# EAGLE board rekick004-panelized (EAGLE 4.16)
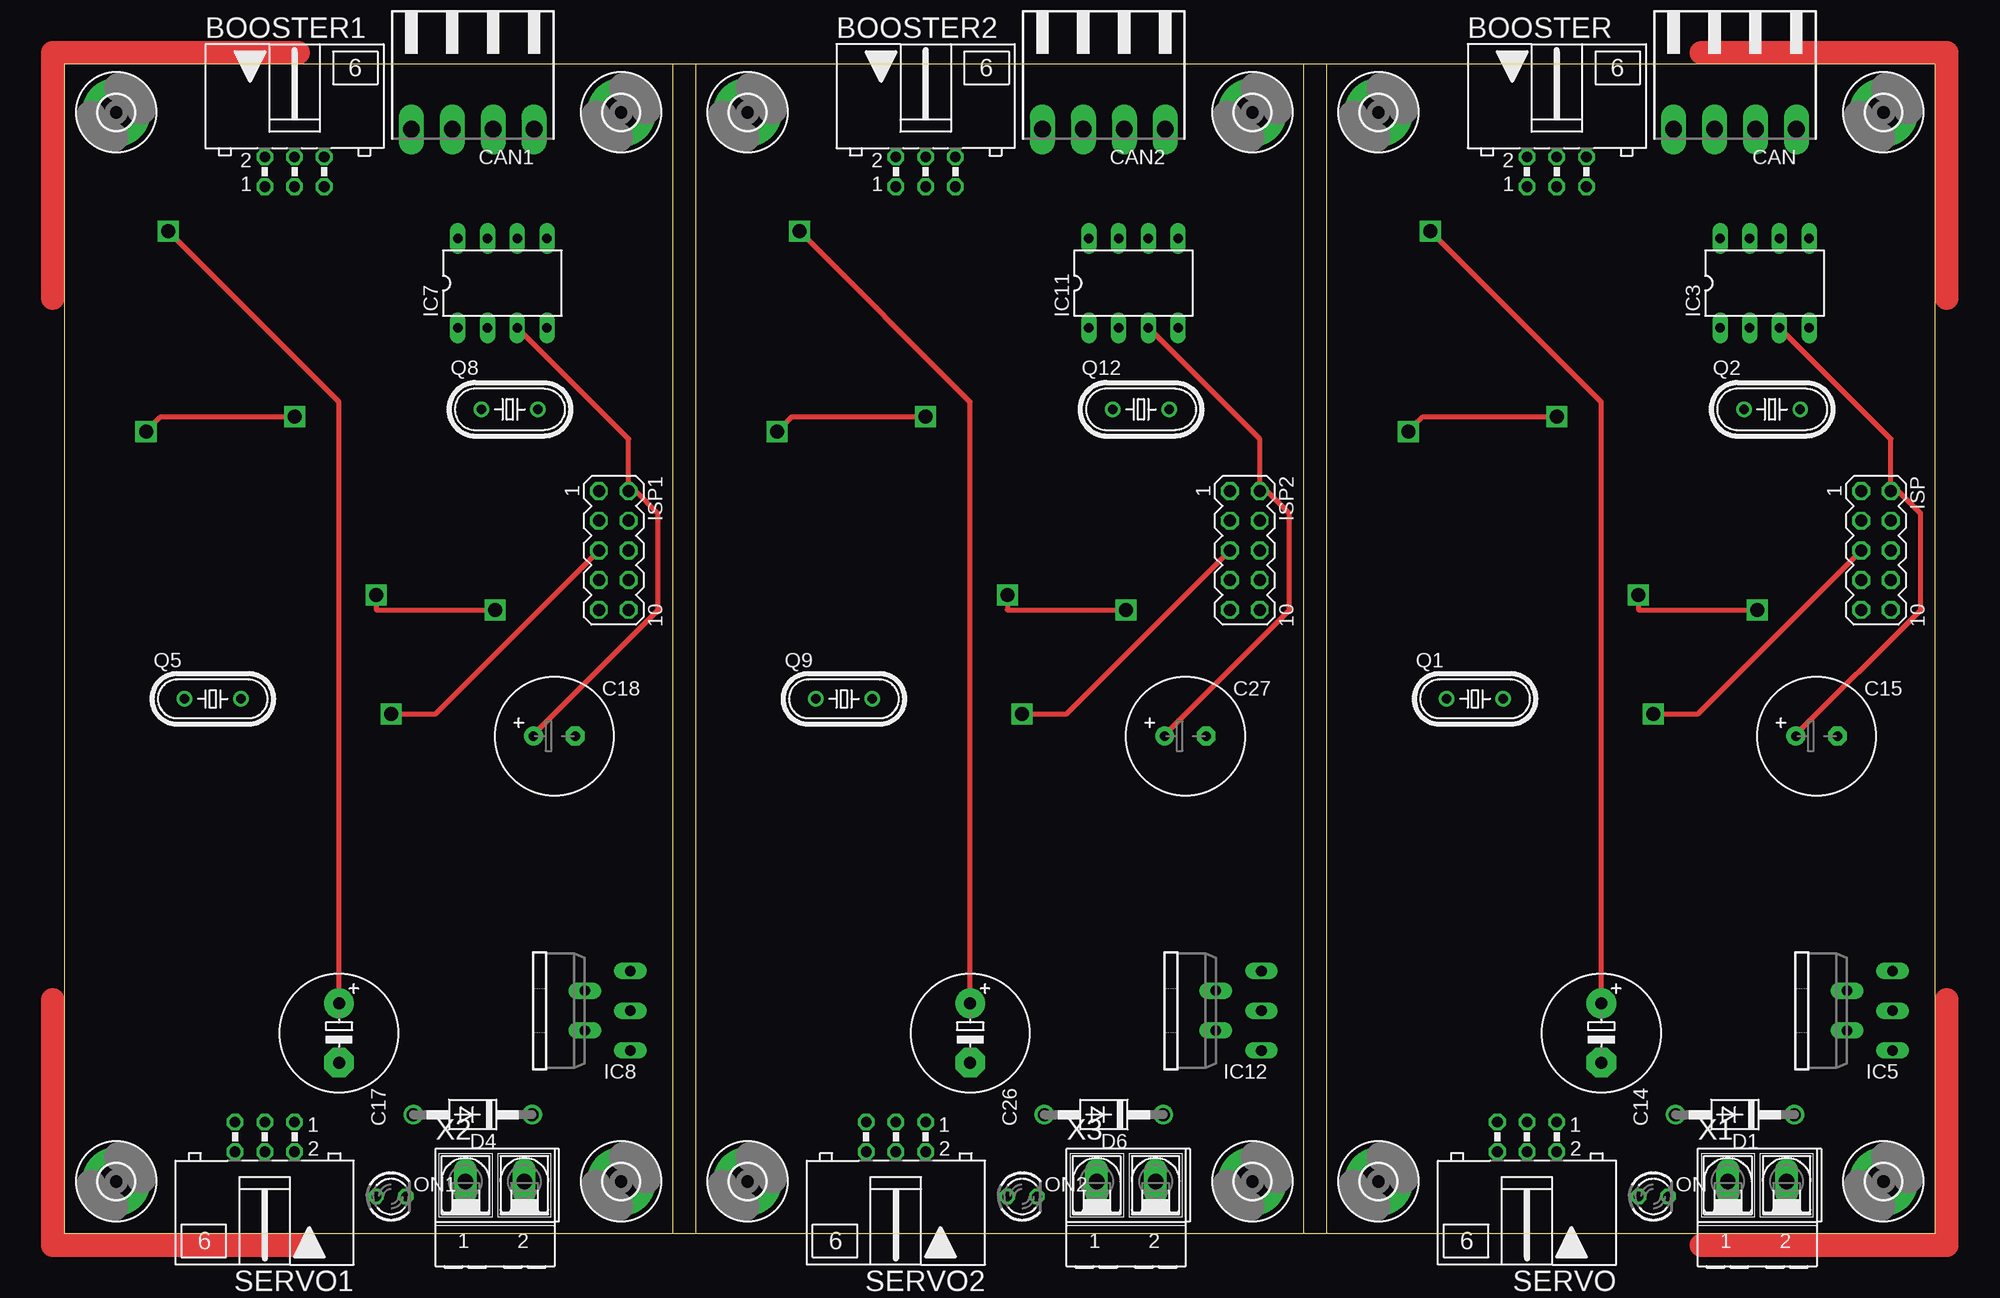
[diagram p0: board, top side]
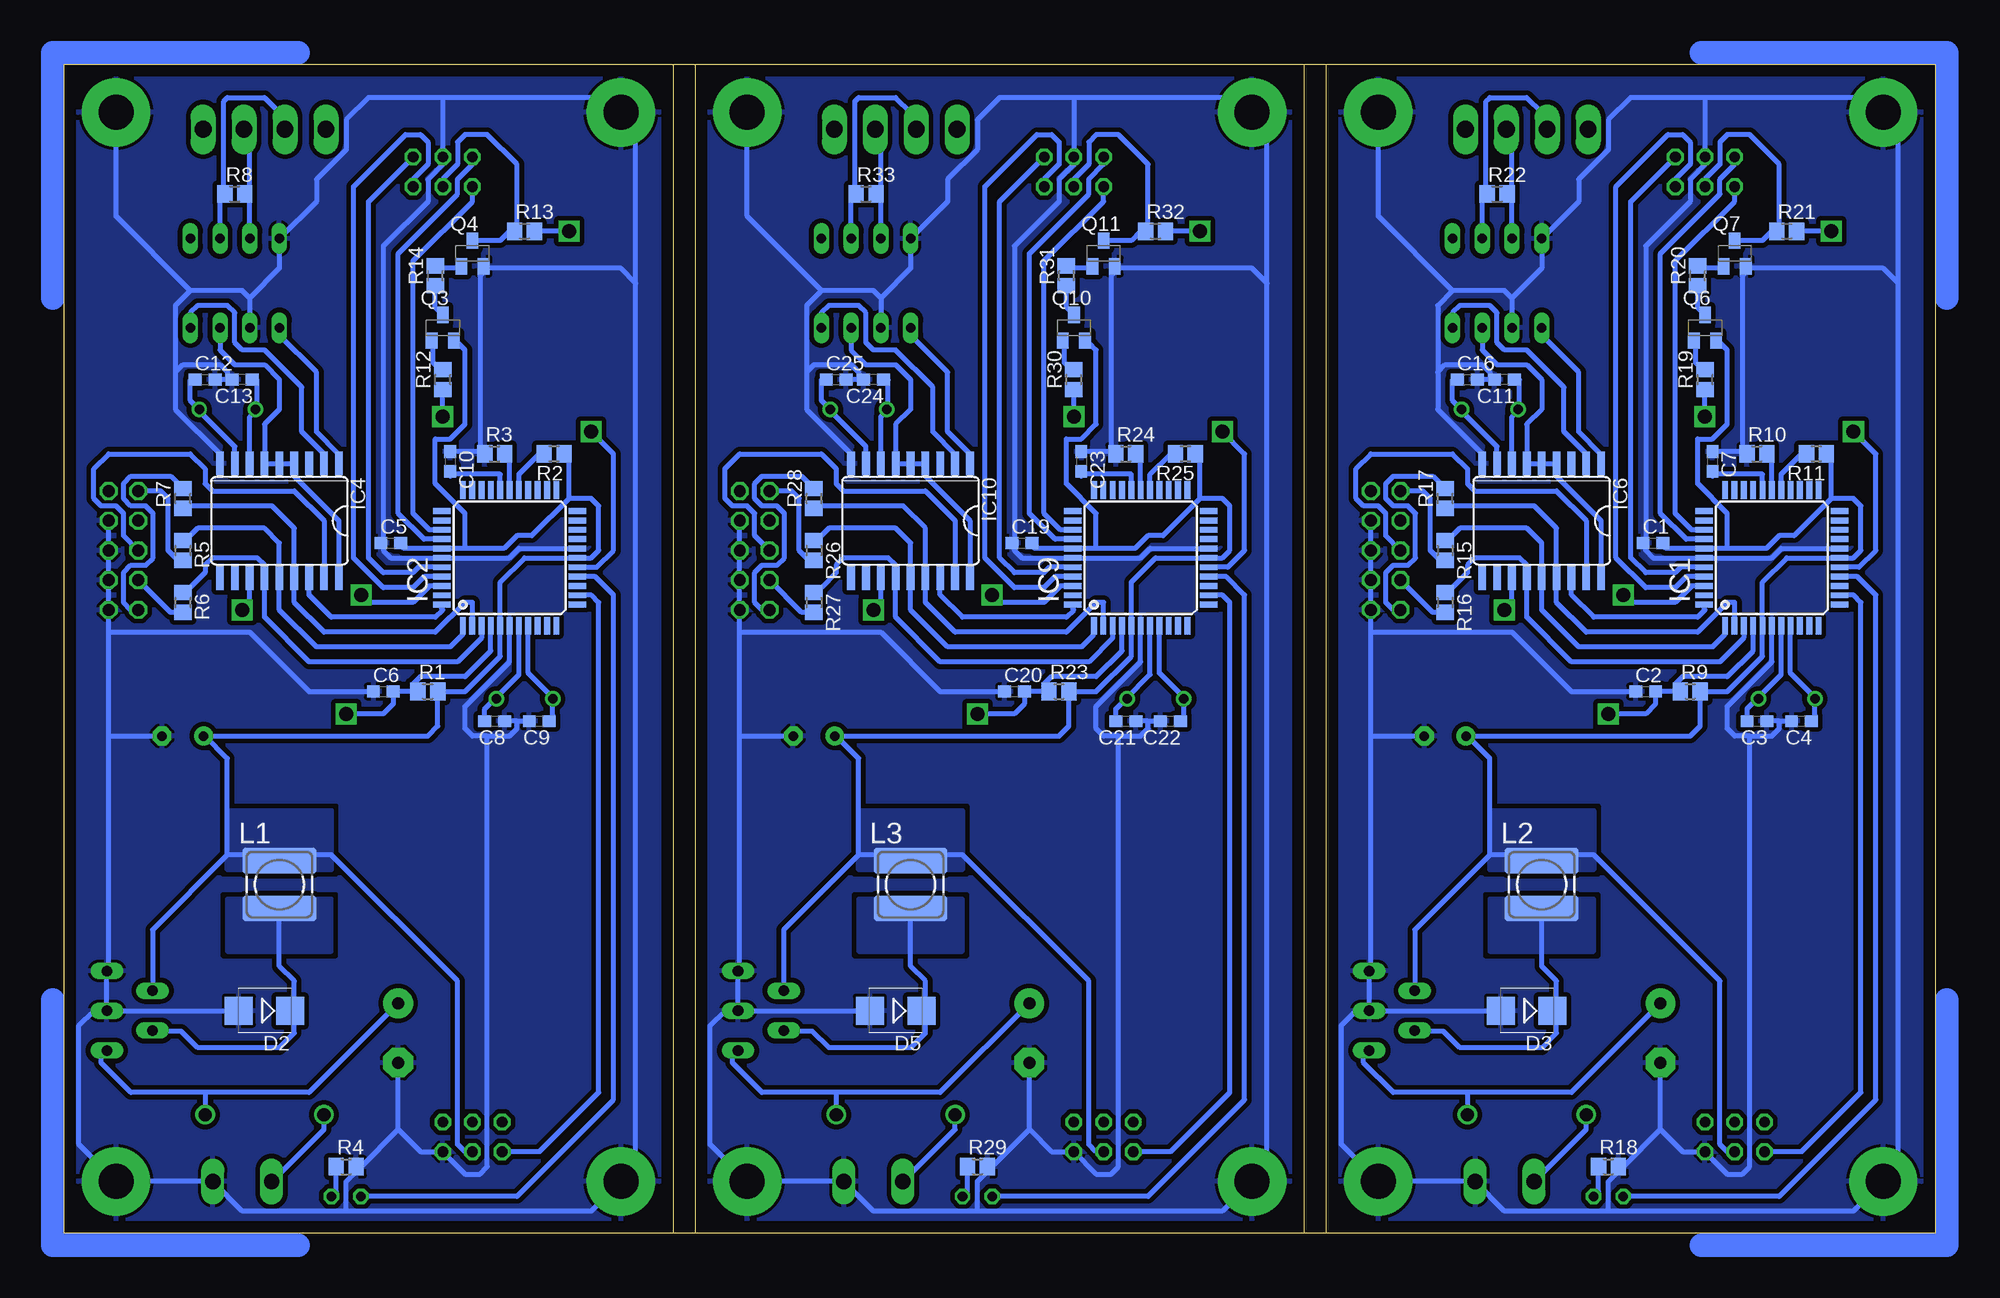
[diagram p1: board, bottom side, seen from below]

Size 160 x 100 mm. Coordinates in mm from the lower left corner, seen from the top.
Outline: 0,0 160,0
Outline: 160,0 160,100
Outline: 160,100 0,100
Outline: 0,100 0,0
Outline: 160,0 107.95,0 107.95,100 160,100
Outline: 160,0 160,100
Outline: 0,0 52.05,0 52.05,100 0,100
Outline: 0,100 0,0
Outline: 53.98,0 106.03,0 106.03,100 53.98,100 53.98,0
Copper layers (1*16): Top 0.035mm / dielectric 1.5mm / Bottom 0.035mm
Design rules "default": minimum track width 10mil, minimum drill 24mil, track to track 8mil, track to pad 8mil, pad to pad 8mil, via to via 8mil, smd to smd 8mil, copper to edge 40mil, drill to drill 8mil, minimum pad ring 10mil, minimum via ring 8mil, stop-mask expansion 4mil, vias tented up to drill 0mil, thermal gap 10mil
Net classes: 1 Power: width 0.406 mm

## Footprints (pad centres in the part's own frame; a part is rotated, then mirrored left to right if it is on the bottom)
ML6L = drill 0.914 octagon: 1 -2.54,-1.27; 2 -2.54,1.27; 3 0,-1.27; 4 0,1.27; 5 2.54,-1.27; 6 2.54,1.27
C0603 = smd 1.1 x 1: 1 -0.85,0; 2 0.85,0
E5-10,5 = drill 1.016 pad 2.54 round: + -2.54,0 | drill 1.016 pad 2.54 octagon: - 2.54,0
E3,5-10 = drill 0.813 pad 1.6 round: + -1.778,0 | drill 0.813 pad 1.6 octagon: - 1.778,0
90-4 = drill 1.422 long: 1 -5.25,5.25; 2 -1.75,5.25; 3 1.75,5.25; 4 5.25,5.25
DO41-10 = drill 1.118 round: A 5.08,0; C -5.08,0
SMB = smd 2.4 x 2.4: A 2.2,0; C -2.2,0
3,0-PAD = drill 3 pad 5.842 round: B3,0 0,0
TQFP44 = smd 1.5 x 0.5: 1 -5.8,4; 2 -5.8,3.2; 3 -5.8,2.4; 4 -5.8,1.6; 5 -5.8,0.8; 6 -5.8,0; 7 -5.8,-0.8; 8 -5.8,-1.6; 9 -5.8,-2.4; 10 -5.8,-3.2; 11 -5.8,-4; 23 5.8,-4; 24 5.8,-3.2; 25 5.8,-2.4; 26 5.8,-1.6; 27 5.8,-0.8; 28 5.8,0; 29 5.8,0.8; 30 5.8,1.6; 31 5.8,2.4; 32 5.8,3.2; 33 5.8,4 | smd 0.5 x 1.5: 12 -4,-5.8; 13 -3.2,-5.8; 14 -2.4,-5.8; 15 -1.6,-5.8; 16 -0.8,-5.8; 17 0,-5.8; 18 0.8,-5.8; 19 1.6,-5.8; 20 2.4,-5.8; 21 3.2,-5.8; 22 4,-5.8; 34 4,5.8; 35 3.2,5.8; 36 2.4,5.8; 37 1.6,5.8; 38 0.8,5.8; 39 0,5.8; 40 -0.8,5.8; 41 -1.6,5.8; 42 -2.4,5.8; 43 -3.2,5.8; 44 -4,5.8
DIL08 = drill 0.813 long: 1 -3.81,-3.81; 2 -1.27,-3.81; 3 1.27,-3.81; 4 3.81,-3.81; 5 3.81,3.81; 6 1.27,3.81; 7 -1.27,3.81; 8 -3.81,3.81
SO18L = smd 0.66 x 2.032: 1 -5.08,-4.902; 2 -3.81,-4.902; 3 -2.54,-4.902; 4 -1.27,-4.902; 5 0,-4.902; 6 1.27,-4.902; 7 2.54,-4.902; 8 3.81,-4.902; 9 5.08,-4.902; 10 5.08,4.902; 11 3.81,4.902; 12 2.54,4.902; 13 1.27,4.902; 14 0,4.902; 15 -1.27,4.902; 16 -2.54,4.902; 17 -3.81,4.902; 18 -5.08,4.902
TO220-51 = drill 0.9 long: 1 -3.4,-8.4; 2 -1.7,-4.5; 3 0,-8.4; 4 1.7,-4.5; 5 3.4,-8.4
MA05-2 = drill 1.016 octagon: 1 -5.08,-1.27; 2 -5.08,1.27; 3 -2.54,-1.27; 4 -2.54,1.27; 5 0,-1.27; 6 0,1.27; 7 2.54,-1.27; 8 2.54,1.27; 9 5.08,-1.27; 10 5.08,1.27
POWER-CHOKE_WE-TPC = smd 6.3 x 2.2: 1 0,2.05; 2 0,-2.05
LED3MM = drill 0.813 octagon: A -1.27,0; K 1.27,0
HC49/S = drill 0.813 round: 1 -2.413,0; 2 2.413,0
HC49U-V = drill 0.813 round: 1 -2.413,0; 2 2.413,0
SOT23-BEC = smd 1 x 1.4: B -0.95,-1.1; C 0,1.1; E 0.95,-1.1
R0805 = smd 1.3 x 1.5: 1 -0.85,0; 2 0.85,0
AK500/2-H = drill 1.321 long: 1 -2.515,0; 2 2.515,0

## Placement (x,y rotation side)
BOOSTER  [ML6L]  127.64,90.81 0 top
BOOSTER1  [ML6L]  19.68,90.81 0 top
BOOSTER2  [ML6L]  73.66,90.81 0 top
C1  100n  [C0603]  24.13,59.05 0 bottom
C2  100n  [C0603]  24.77,46.35 0 bottom
C3  22p  [C0603]  15.24,43.81 180 bottom
C4  22p  [C0603]  11.43,43.81 180 bottom
C5  100n  [C0603]  132.08,59.05 0 bottom
C6  100n  [C0603]  132.72,46.35 0 bottom
C7  100n  [C0603]  19.05,66.04 270 bottom
C8  22p  [C0603]  123.19,43.81 180 bottom
C9  22p  [C0603]  119.38,43.81 180 bottom
C10  100n  [C0603]  127,66.04 270 bottom
C11  22p  [C0603]  36.83,73.03 180 bottom
C12  22p  [C0603]  147.96,73.03 0 bottom
C13  22p  [C0603]  144.78,73.03 180 bottom
C14  220µF/35V  [E5-10,5]  131.44,17.14 270 top
C15  220µF/25V  [E3,5-10]  149.86,42.55 0 top
C16  22p  [C0603]  40.01,73.03 0 bottom
C17  220µF/35V  [E5-10,5]  23.5,17.14 270 top
C18  220µF/25V  [E3,5-10]  41.91,42.55 0 top
C19  100n  [C0603]  78.11,59.05 0 bottom
C20  100n  [C0603]  78.74,46.35 0 bottom
C21  22p  [C0603]  69.22,43.81 180 bottom
C22  22p  [C0603]  65.41,43.81 180 bottom
C23  100n  [C0603]  73.03,66.04 270 bottom
C24  22p  [C0603]  90.81,73.03 180 bottom
C25  22p  [C0603]  93.98,73.03 0 bottom
C26  220µF/35V  [E5-10,5]  77.47,17.14 270 top
C27  220µF/25V  [E3,5-10]  95.89,42.55 0 top
CAN  [90-4]  142.88,99.69 180 top
CAN1  [90-4]  34.92,99.69 180 top
CAN2  [90-4]  88.9,99.69 180 top
D1  1N4001  [DO41-10]  142.88,10.16 180 top
D2  MBRS360  [SMB]  142.88,19.05 180 bottom
D3  MBRS360  [SMB]  34.92,19.05 180 bottom
D4  1N4001  [DO41-10]  34.92,10.16 180 top
D5  MBRS360  [SMB]  88.9,19.05 180 bottom
D6  1N4001  [DO41-10]  88.9,10.16 180 top
H1  MOUNT-PAD-ROUND3.0  [3,0-PAD]  112.39,95.89 0 top
H2  MOUNT-PAD-ROUND3.0  [3,0-PAD]  112.39,4.45 0 top
H3  MOUNT-PAD-ROUND3.0  [3,0-PAD]  155.57,95.89 0 top
H4  MOUNT-PAD-ROUND3.0  [3,0-PAD]  155.57,4.45 0 top
H5  MOUNT-PAD-ROUND3.0  [3,0-PAD]  4.45,95.89 0 top
H6  MOUNT-PAD-ROUND3.0  [3,0-PAD]  4.45,4.45 0 top
H7  MOUNT-PAD-ROUND3.0  [3,0-PAD]  47.62,95.89 0 top
H8  MOUNT-PAD-ROUND3.0  [3,0-PAD]  47.62,4.45 0 top
H9  MOUNT-PAD-ROUND3.0  [3,0-PAD]  58.42,95.89 0 top
H10  MOUNT-PAD-ROUND3.0  [3,0-PAD]  58.42,4.45 0 top
H11  MOUNT-PAD-ROUND3.0  [3,0-PAD]  101.6,95.89 0 top
H12  MOUNT-PAD-ROUND3.0  [3,0-PAD]  101.6,4.45 0 top
IC1  MEGA32-A  [TQFP44]  13.97,57.78 90 bottom
IC2  MEGA32-A  [TQFP44]  121.92,57.78 90 bottom
IC3  PCA82C250  [DIL08]  145.41,81.28 0 top
IC4  MCP2515-E/SO  [SO18L]  141.6,60.96 180 bottom
IC5  LM2576-5V  [TO220-51]  147.96,19.05 90 top
IC6  MCP2515-E/SO  [SO18L]  33.66,60.96 180 bottom
IC7  PCA82C250  [DIL08]  37.47,81.28 0 top
IC8  LM2576-5V  [TO220-51]  40.01,19.05 90 top
IC9  MEGA32-A  [TQFP44]  67.94,57.78 90 bottom
IC10  MCP2515-E/SO  [SO18L]  87.63,60.96 180 bottom
IC11  PCA82C250  [DIL08]  91.44,81.28 0 top
IC12  LM2576-5V  [TO220-51]  93.98,19.05 90 top
ISP  [MA05-2]  154.94,58.42 270 top
ISP1  [MA05-2]  46.99,58.42 270 top
ISP2  [MA05-2]  100.97,58.42 270 top
L1  L-PISR 100u  [POWER-CHOKE_WE-TPC]  141.6,29.84 0 bottom
L2  L-PISR 100u  [POWER-CHOKE_WE-TPC]  33.66,29.84 0 bottom
L3  L-PISR 100u  [POWER-CHOKE_WE-TPC]  87.63,29.84 0 bottom
ON  green  [LED3MM]  135.89,3.17 0 top
ON1  green  [LED3MM]  27.94,3.17 0 top
ON2  green  [LED3MM]  81.92,3.17 0 top
Q1  16MHz  [HC49/S]  120.65,45.72 0 top
Q2  16MHz  [HC49U-V]  146.05,70.48 0 top
Q3  BC807  [SOT23-BEC]  127.64,77.47 0 bottom
Q4  BC817-25SMD  [SOT23-BEC]  125.09,83.82 0 bottom
Q5  16MHz  [HC49/S]  12.7,45.72 0 top
Q6  BC807  [SOT23-BEC]  19.68,77.47 0 bottom
Q7  BC817-25SMD  [SOT23-BEC]  17.14,83.82 0 bottom
Q8  16MHz  [HC49U-V]  38.1,70.48 0 top
Q9  16MHz  [HC49/S]  66.67,45.72 0 top
Q10  BC807  [SOT23-BEC]  73.66,77.47 0 bottom
Q11  BC817-25SMD  [SOT23-BEC]  71.12,83.82 0 bottom
Q12  16MHz  [HC49U-V]  92.08,70.48 0 top
R1  10k  [R0805]  128.91,46.35 0 bottom
R2  0  [R0805]  118.11,66.67 180 bottom
R3  0  [R0805]  123.19,66.67 0 bottom
R4  2k7  [R0805]  135.89,5.71 0 bottom
R5  4k7  [R0805]  149.86,58.42 270 bottom
R6  4k7  [R0805]  149.86,53.98 270 bottom
R7  4k7  [R0805]  149.86,62.87 90 bottom
R8  4k7  [R0805]  145.41,88.9 0 bottom
R9  10k  [R0805]  20.95,46.35 0 bottom
R10  0  [R0805]  15.24,66.67 0 bottom
R11  0  [R0805]  10.16,66.67 180 bottom
R12  1k  [R0805]  127.64,73.03 90 bottom
R13  330  [R0805]  120.65,85.72 0 bottom
R14  4k7  [R0805]  128.27,81.92 90 bottom
R15  4k7  [R0805]  41.91,58.42 270 bottom
R16  4k7  [R0805]  41.91,53.98 270 bottom
R17  4k7  [R0805]  41.91,62.87 90 bottom
R18  2k7  [R0805]  27.94,5.71 0 bottom
R19  1k  [R0805]  19.68,73.03 90 bottom
R20  4k7  [R0805]  20.32,81.92 90 bottom
R21  330  [R0805]  12.7,85.72 0 bottom
R22  4k7  [R0805]  37.47,88.9 0 bottom
R23  10k  [R0805]  74.93,46.35 0 bottom
R24  0  [R0805]  69.22,66.67 0 bottom
R25  0  [R0805]  64.14,66.67 180 bottom
R26  4k7  [R0805]  95.89,58.42 270 bottom
R27  4k7  [R0805]  95.89,53.98 270 bottom
R28  4k7  [R0805]  95.89,62.87 90 bottom
R29  2k7  [R0805]  81.92,5.71 0 bottom
R30  1k  [R0805]  73.66,73.03 90 bottom
R31  4k7  [R0805]  74.3,81.92 90 bottom
R32  330  [R0805]  66.67,85.72 0 bottom
R33  4k7  [R0805]  91.44,88.9 0 bottom
SERVO  [ML6L]  125.09,8.26 180 top
SERVO1  [ML6L]  17.14,8.26 180 top
SERVO2  [ML6L]  71.12,8.26 180 top
X1  [AK500/2-H]  144.78,4.45 0 top
X2  [AK500/2-H]  36.83,4.45 0 top
X3  [AK500/2-H]  90.81,4.45 0 top

## Library data of the parts
BOOSTER BOOSTER1 BOOSTER2 SERVO SERVO1 SERVO2 = con-harting-ml
C1-C27 L1-L3 R1-R33 = rcl
CAN CAN1 CAN2 = con-weidmueller-sl35
D1-D6 = diode
H1-H12 = holes
IC1 IC2 IC9 = atmel
IC3 IC7 IC11 = micro-philips
IC4 IC6 IC10 = mcp2515
IC5 IC8 IC12 = linear
ISP ISP1 ISP2 = con-lstb
ON ON1 ON2 = led
Q1 Q2 Q5 Q8 Q9 Q12 = crystal
Q3 Q6 Q10 = transistor-pnp
Q4 Q7 Q11 = transistor-npn
X1-X3 = con-ptr500

## Nets
+5V [Power]: C5.2 C15.+ IC2.5 IC2.17 IC2.38 IC3.3 IC4.4 IC4.5 IC4.6 IC4.18 IC5.4 ISP.2 L1.1 Q3.E R1.2 R2.1 SERVO.4
+5V1 [Power]: C1.2 C18.+ IC1.5 IC1.17 IC1.38 IC6.4 IC6.5 IC6.6 IC6.18 IC7.3 IC8.4 ISP1.2 L2.1 Q6.E R9.2 R11.1 SERVO1.4
+5V2 [Power]: C19.2 C27.+ IC9.5 IC9.17 IC9.38 IC10.4 IC10.5 IC10.6 IC10.18 IC11.3 IC12.4 ISP2.2 L3.1 Q10.E R23.2 R25.1 SERVO2.4
+24V [Power]: C14.+ D1.C IC5.1 R13.2
+24V1 [Power]: C17.+ D4.C IC8.1 R21.2
+24V2 [Power]: C26.+ D6.C IC12.1 R32.2
ADC_BOOST: BOOSTER.2 IC2.37
ADC_BOOST1: BOOSTER1.2 IC1.37
ADC_BOOST2: BOOSTER2.2 IC9.37
ADC_C: BOOSTER.1 IC2.36
ADC_C1: BOOSTER1.1 IC1.36
ADC_C2: BOOSTER2.1 IC9.36
BOOSTER_ON: BOOSTER.6 IC2.40
BOOSTER_ON1: BOOSTER1.6 IC1.40
BOOSTER_ON2: BOOSTER2.6 IC9.40
CS: IC2.44 IC4.16
CS1: IC1.44 IC6.16
CS2: IC9.44 IC10.16
GND [Power]: BOOSTER.4 C5.1 C6.1 C8.1 C9.2 C10.1 C12.2 C13.2 C14.- C15.- D2.A H1.B3,0 H2.B3,0 H3.B3,0 H4.B3,0 IC2.6 IC2.18 IC2.39 IC3.2 IC3.8 IC4.9 IC5.3 IC5.5 ISP.4 ISP.6 ISP.8 ISP.10 Q4.E R3.1 R4.2 SERVO.2 X1.2
GND1 [Power]: BOOSTER1.4 C1.1 C2.1 C3.1 C4.2 C7.1 C11.2 C16.2 C17.- C18.- D3.A H5.B3,0 H6.B3,0 H7.B3,0 H8.B3,0 IC1.6 IC1.18 IC1.39 IC6.9 IC7.2 IC7.8 IC8.3 IC8.5 ISP1.4 ISP1.6 ISP1.8 ISP1.10 Q7.E R10.1 R18.2 SERVO1.2 X2.2
GND2 [Power]: BOOSTER2.4 C19.1 C20.1 C21.1 C22.2 C23.1 C24.2 C25.2 C26.- C27.- D5.A H9.B3,0 H10.B3,0 H11.B3,0 H12.B3,0 IC9.6 IC9.18 IC9.39 IC10.9 IC11.2 IC11.8 IC12.3 IC12.5 ISP2.4 ISP2.6 ISP2.8 ISP2.10 Q11.E R24.1 R29.2 SERVO2.2 X3.2
MISO: IC2.2 IC4.15 R7.1
MISO1: IC1.2 IC6.15 R17.1
MISO2: IC9.2 IC10.15 R28.1
MOSI: IC2.1 IC4.14 R5.1
MOSI1: IC1.1 IC6.14 R15.1
MOSI2: IC9.1 IC10.14 R26.1
N$1: IC2.15 ON.A
N$2: C10.2 IC2.29
N$3: IC2.27 R2.2
N$4: C9.1 IC2.8 Q1.1
N$5: C8.2 IC2.7 Q1.2
N$6: ISP.1 R5.2
N$7: IC2.28 R3.2
N$8: ISP.7 R6.2
N$9: ISP.9 R7.2
N$10: C4.1 IC1.8 Q5.1
N$11: IC2.42 IC4.12
N$12: IC3.1 IC4.1
N$13: IC2.16 R12.1
N$14: IC2.13 SERVO.6
N$15: C3.2 IC1.7 Q5.2
N$16: ISP1.1 R15.2
N$17: ISP1.7 R16.2
N$18: ISP1.9 R17.2
N$19: ON1.K R18.1
N$20: IC1.15 ON1.A
N$21: Q3.C R14.1
N$22: IC3.4 IC4.2
N$23: Q4.B R14.2
N$24: CAN.3 IC3.6 R8.1
N$25: Q3.B R12.2
N$26: D1.A X1.1
N$27: C7.2 IC1.29
N$28: IC1.27 R11.2
N$29: IC1.28 R10.2
N$30 [Power]: D2.C IC5.2 L1.2
N$31: ON.K R4.1
N$32: Q6.B R19.2
N$33: Q6.C R20.1
N$34: Q7.B R20.2
N$35: IC1.16 R19.1
N$36: IC1.13 SERVO1.6
N$37: IC6.1 IC7.1
N$38: C11.1 IC6.7 Q8.1
N$39: C16.1 IC6.8 Q8.2
N$40: CAN1.3 IC7.6 R22.1
N$41: CAN1.2 IC7.7 R22.2
N$42: IC6.2 IC7.4
N$43: IC1.42 IC6.12
N$44: D4.A X2.1
N$45 [Power]: D3.C IC8.2 L2.2
N$46: C22.1 IC9.8 Q9.1
N$47: C21.2 IC9.7 Q9.2
N$48: ISP2.1 R26.2
N$49: ISP2.7 R27.2
N$50: ISP2.9 R28.2
N$51: ON2.K R29.1
N$52: IC9.15 ON2.A
N$53: C13.1 IC4.7 Q2.1
N$54: C12.1 IC4.8 Q2.2
N$55: C23.2 IC9.29
N$56: IC9.27 R25.2
N$57: IC9.28 R24.2
N$58: Q10.B R30.2
N$59: CAN.2 IC3.7 R8.2
N$60: Q10.C R31.1
N$61: Q11.B R31.2
N$62: IC9.16 R30.1
N$63: IC9.13 SERVO2.6
N$64: IC10.1 IC11.1
N$65: C24.1 IC10.7 Q12.1
N$66: C25.1 IC10.8 Q12.2
N$67: CAN2.3 IC11.6 R33.1
N$68: CAN2.2 IC11.7 R33.2
N$69: IC10.2 IC11.4
N$70: IC9.42 IC10.12
N$71: D6.A X3.1
N$72 [Power]: D5.C IC12.2 L3.2
PWM_LOAD: BOOSTER.3 Q4.C R13.1
PWM_LOAD1: BOOSTER1.3 Q7.C R21.1
PWM_LOAD2: BOOSTER2.3 Q11.C R32.1
RELEASE: BOOSTER.5 IC2.41
RELEASE1: BOOSTER1.5 IC1.41
RELEASE2: BOOSTER2.5 IC9.41
RST: C6.2 IC2.4 IC4.17 ISP.5 R1.1
RST1: C2.2 IC1.4 IC6.17 ISP1.5 R9.1
RST2: C20.2 IC9.4 IC10.17 ISP2.5 R23.1
SCK: IC2.3 IC4.13 R6.1
SCK1: IC1.3 IC6.13 R16.1
SCK2: IC9.3 IC10.13 R27.1

## Tracks (layer width: path | path; a pad name or v marks a point on that pad's centre or on a via)
+5V
  Top 0.406: IC3.3 156.21,67.94 ISP.2 156.84,63.5 158.75,61.59 158.75,53.34 147.96,42.55 C15.+
  Bottom 0.406: 116.2,57.78 120.65,57.78 122.72,55.72 IC2.5 122.72,49.37 125.73,46.35 R1.2 128.06,43.4 128.91,42.55 147.96,42.55 | 125.73,58.59 122.39,58.59 121.28,59.69 120.02,59.69 116.84,62.87 | 125.73,58.59 IC2.38 130.97,58.59 131.44,59.05 C5.2 | 116.2,57.78 IC2.17 | R2.1 116.84,66.25 116.84,62.87 | IC3.3 146.69,75.56 145.41,74.3 142.88,74.3 141.6,73.03 141.6,70.48 142.88,69.22 IC4.6 141.78,65.86 141.6,66.04 IC4.5 140.51,65.86 140.34,66.04 IC4.4 140.34,64.77 136.53,60.96 IC4.18 | 125.73,58.59 125.73,61.59 128.27,64.14 128.27,67.94 127,67.94 125.73,69.22 125.73,75.56 126.36,76.2 | 126.36,76.2 126.52,76.2 | 126.36,76.2 126.53,76.37 Q3.E | SERVO.4 125.73,6.99 126.36,7.62 126.36,21.59 137.16,32.38 141.6,32.38 | 116.2,57.78 114.94,57.78 114.3,58.42 114.3,62.23 114.94,62.87 116.84,62.87 | 141.6,32.38 L1.1 | IC5.4 152.46,25.98 146.05,32.38 | 141.6,32.38 146.05,32.38 | 146.05,32.38 146.05,40.64 147.96,42.55 | 147.96,42.55 C15.+
  pour Bottom (isolate 1.016, no thermals): 137.16,31.11 146.05,31.11 146.05,36.2 137.16,36.2
+5V1
  Top 0.406: IC7.3 48.26,67.94 ISP1.2 48.9,63.5 50.8,61.59 50.8,53.34 40.01,42.55 C18.+
  Bottom 0.406: 8.26,57.78 12.7,57.78 14.77,55.72 IC1.5 14.77,49.37 17.78,46.35 R9.2 20.11,43.4 20.95,42.55 40.01,42.55 | 17.78,58.59 14.44,58.59 13.34,59.69 12.06,59.69 8.89,62.87 | 17.78,58.59 IC1.38 23.02,58.59 23.5,59.05 C1.2 | 8.26,57.78 IC1.17 | R11.1 8.89,66.25 8.89,62.87 | IC7.3 38.73,75.56 37.47,74.3 34.92,74.3 33.66,73.03 33.66,70.48 34.92,69.22 IC6.6 33.83,65.86 33.66,66.04 IC6.5 32.56,65.86 32.38,66.04 IC6.4 32.38,64.77 28.57,60.96 IC6.18 | 17.78,58.59 17.78,61.59 20.32,64.14 20.32,67.94 19.05,67.94 17.78,69.22 17.78,75.56 18.41,76.2 | 18.41,76.2 18.57,76.2 | 18.41,76.2 18.59,76.37 Q6.E | SERVO1.4 17.78,6.99 18.41,7.62 18.41,21.59 29.21,32.38 33.66,32.38 | 8.26,57.78 6.99,57.78 6.35,58.42 6.35,62.23 6.99,62.87 8.89,62.87 | 33.66,32.38 L2.1 | IC8.4 44.51,25.98 38.1,32.38 | 33.66,32.38 38.1,32.38 | 38.1,32.38 38.1,40.64 40.01,42.55 | 40.01,42.55 C18.+
  pour Bottom (isolate 1.016, no thermals): 29.21,31.11 38.1,31.11 38.1,36.2 29.21,36.2
+5V2
  Top 0.406: IC11.3 102.23,67.94 ISP2.2 102.87,63.5 104.78,61.59 104.78,53.34 93.98,42.55 C27.+
  Bottom 0.406: 62.23,57.78 66.67,57.78 68.75,55.72 IC9.5 68.75,49.37 71.75,46.35 R23.2 74.08,43.4 74.93,42.55 93.98,42.55 | 71.75,58.59 68.42,58.59 67.31,59.69 66.04,59.69 62.87,62.87 | 71.75,58.59 IC9.38 77,58.59 77.47,59.05 C19.2 | 62.23,57.78 IC9.17 | R25.1 62.87,66.25 62.87,62.87 | IC11.3 92.71,75.56 91.44,74.3 88.9,74.3 87.63,73.03 87.63,70.48 88.9,69.22 IC10.6 87.81,65.86 87.63,66.04 IC10.5 86.54,65.86 86.36,66.04 IC10.4 86.36,64.77 82.55,60.96 IC10.18 | 71.75,58.59 71.75,61.59 74.3,64.14 74.3,67.94 73.03,67.94 71.75,69.22 71.75,75.56 72.39,76.2 | 72.39,76.2 72.54,76.2 | 72.39,76.2 72.56,76.37 Q10.E | SERVO2.4 71.75,6.99 72.39,7.62 72.39,21.59 83.19,32.38 87.63,32.38 | 62.23,57.78 60.96,57.78 60.33,58.42 60.33,62.23 60.96,62.87 62.87,62.87 | 87.63,32.38 L3.1 | IC12.4 98.48,25.98 92.08,32.38 | 87.63,32.38 92.08,32.38 | 92.08,32.38 92.08,40.64 93.98,42.55 | 93.98,42.55 C27.+
  pour Bottom (isolate 1.016, no thermals): 83.19,31.11 92.08,31.11 92.08,36.2 83.19,36.2
+24V  (via drill 1.2)
  Top 0.406: C14.+ 131.44,71.12 v116.84,85.72
  Bottom 0.406: IC5.1 156.99,15.73 156.84,15.88 156.84,14.61 154.31,12.06 147.96,12.06 | 147.96,12.06 139.06,12.06 C14.+ | 120.02,85.72 R13.2 v116.84,85.72 | 147.96,12.06 D1.C
+24V1  (via drill 1.2)
  Top 0.406: C17.+ 23.5,71.12 v8.89,85.72
  Bottom 0.406: IC8.1 49.04,15.73 48.9,15.88 48.9,14.61 46.35,12.06 40.01,12.06 | 40.01,12.06 31.11,12.06 C17.+ | 12.06,85.72 R21.2 v8.89,85.72 | 40.01,12.06 D4.C
+24V2  (via drill 1.2)
  Top 0.406: C26.+ 77.47,71.12 v62.87,85.72
  Bottom 0.406: IC12.1 103.02,15.73 102.87,15.88 102.87,14.61 100.33,12.06 93.98,12.06 | 93.98,12.06 85.09,12.06 C26.+ | 66.04,85.72 R32.2 v62.87,85.72 | 93.98,12.06 D6.C
ADC_BOOST
  Bottom 0.406: IC2.37 129.24,59.38 131.44,61.59 131.44,83.82 126.36,88.9 126.36,90.17 125.09,91.44 BOOSTER.2
ADC_BOOST1
  Bottom 0.406: IC1.37 21.29,59.38 23.5,61.59 23.5,83.82 18.41,88.9 18.41,90.17 17.14,91.44 BOOSTER1.2
ADC_BOOST2
  Bottom 0.406: IC9.37 75.26,59.38 77.47,61.59 77.47,83.82 72.39,88.9 72.39,90.17 71.12,91.44 BOOSTER2.2
ADC_C
  Bottom 0.406: IC2.36 128.76,60.19 130.18,61.59 130.18,83.19 125.09,88.27 BOOSTER.1
ADC_C1
  Bottom 0.406: IC1.36 20.82,60.19 22.23,61.59 22.23,83.19 17.14,88.27 BOOSTER1.1
ADC_C2
  Bottom 0.406: IC9.36 74.79,60.19 76.2,61.59 76.2,83.19 71.12,88.27 BOOSTER2.1
BOOSTER_ON
  Bottom 0.406: IC2.40 129.71,56.98 130.18,56.52 132.72,56.52 133.99,57.78 133.99,88.27 BOOSTER.6
BOOSTER_ON1
  Bottom 0.406: IC1.40 21.75,56.98 22.23,56.52 24.77,56.52 26.04,57.78 26.04,88.27 BOOSTER1.6
BOOSTER_ON2
  Bottom 0.406: IC9.40 75.73,56.98 76.2,56.52 78.74,56.52 80.01,57.78 80.01,88.27 BOOSTER2.6
CS
  Bottom 0.406: IC4.16 139.06,54.61 137.16,52.7 128.27,52.7 127.64,53.34 127.72,53.42 IC2.44
CS1
  Bottom 0.406: IC6.16 31.11,54.61 29.21,52.7 20.32,52.7 19.68,53.34 19.77,53.42 IC1.44
CS2
  Bottom 0.406: IC10.16 85.09,54.61 83.19,52.7 74.3,52.7 73.66,53.34 73.75,53.42 IC9.44
GND
  Bottom 0.406: IC2.18 121.12,58.59 121.92,57.78 IC2.39 132.08,57.78 132.72,58.42 132.72,59.05 C5.1 132.72,59.27 132.72,84.45 128.91,88.27 128.91,90.17 127.64,91.44 BOOSTER.4 127.64,97.16 | 120.02,43.81 C9.2 121.28,43.81 | 121.28,43.81 C8.1 | IC2.6 121.92,48.9 125.73,45.09 125.73,43.18 125.09,42.55 123.83,42.55 | 121.28,43.81 121.28,43.18 121.92,42.55 123.83,42.55 | ISP.4 ISP.6 ISP.8 ISP.10 156.21,51.44 | 146.05,73.03 C12.2 | IC4.9 146.69,66.67 150.5,70.48 150.5,73.66 | 150.5,73.66 149.86,74.3 146.69,74.3 146.05,73.66 146.05,73.03 | 146.05,73.03 C13.2 | 144.15,80.01 IC3.2 | 144.15,80.01 144.78,80.64 149.22,80.64 | 149.22,80.64 150.5,79.38 150.5,73.66 | 144.15,80.01 141.6,82.55 IC3.8 138.43,88.27 138.43,90.17 135.89,92.71 135.89,95.25 133.99,97.16 127.64,97.16 | H3.B3,0 155.57,87 149.22,80.64 | 123.83,82.55 112.39,82.55 111.12,81.28 | 123.83,82.55 123.97,82.55 Q4.E 124,82.72 123.83,82.55 | 135.04,5.29 R4.2 134.62,5.71 | IC5.3 157.48,19.05 158.75,17.78 158.75,7.62 H4.B3,0 147.32,4.45 | IC5.3 156.35,22.08 156.21,22.23 | C6.1 139.06,46.35 144.15,51.44 156.21,51.44 | C10.1 124.04,66.89 123.83,66.67 R3.1 124.46,66.67 124.46,81.92 123.83,82.55 | 127.64,97.16 113.67,97.16 H1.B3,0 111.12,94.61 111.12,81.28 | 111.12,81.28 111.12,5.71 H2.B3,0 114.94,1.91 135.89,1.91 | 147.32,4.45 X1.2 | 135.89,1.91 144.78,1.91 147.32,4.45 | 134.62,5.71 135.89,4.45 135.89,1.91 | 134.62,5.71 131.44,8.89 | 131.44,8.89 C14.- | 131.44,8.89 129.54,6.99 SERVO.2 125.73,5.08 124.46,5.08 123.83,5.71 123.83,42.55 | IC5.3 D2.A | 156.21,22.23 156.35,22.37 IC5.5 | 156.21,22.23 156.21,42.55 | 156.21,42.55 156.21,51.44 | 156.21,42.55 C15.-
  pour Bottom (isolate 0.406, rank 3): 107.95,100.33 160.02,100.33 160.02,0 107.95,0
GND1
  Bottom 0.406: IC1.18 13.17,58.59 13.97,57.78 IC1.39 24.13,57.78 24.77,58.42 24.77,59.05 C1.1 24.77,59.27 24.77,84.45 20.95,88.27 20.95,90.17 19.68,91.44 BOOSTER1.4 19.68,97.16 | 12.06,43.81 C4.2 13.34,43.81 | 13.34,43.81 C3.1 | IC1.6 13.97,48.9 17.78,45.09 17.78,43.18 17.14,42.55 15.88,42.55 | 13.34,43.81 13.34,43.18 13.97,42.55 15.88,42.55 | ISP1.4 ISP1.6 ISP1.8 ISP1.10 48.26,51.44 | 38.1,73.03 C16.2 | IC6.9 38.73,66.67 42.55,70.48 42.55,73.66 | 42.55,73.66 41.91,74.3 38.73,74.3 38.1,73.66 38.1,73.03 | 38.1,73.03 C11.2 | 36.2,80.01 IC7.2 | 36.2,80.01 36.83,80.64 41.27,80.64 | 41.27,80.64 42.55,79.38 42.55,73.66 | 36.2,80.01 33.66,82.55 IC7.8 30.48,88.27 30.48,90.17 27.94,92.71 27.94,95.25 26.04,97.16 19.68,97.16 | H7.B3,0 47.62,87 41.27,80.64 | 15.88,82.55 4.45,82.55 3.17,81.28 | 15.88,82.55 16.02,82.55 Q7.E 16.05,82.72 15.88,82.55 | 27.09,5.29 R18.2 26.67,5.71 | IC8.3 49.53,19.05 50.8,17.78 50.8,7.62 H8.B3,0 39.37,4.45 | IC8.3 48.41,22.08 48.26,22.23 | C2.1 31.11,46.35 36.2,51.44 48.26,51.44 | C7.1 16.09,66.89 15.88,66.67 R10.1 16.51,66.67 16.51,81.92 15.88,82.55 | 19.68,97.16 5.71,97.16 H5.B3,0 3.17,94.61 3.17,81.28 | 3.17,81.28 3.17,5.71 H6.B3,0 6.99,1.91 27.94,1.91 | 39.37,4.45 X2.2 | 27.94,1.91 36.83,1.91 39.37,4.45 | 26.67,5.71 27.94,4.45 27.94,1.91 | 26.67,5.71 23.5,8.89 | 23.5,8.89 C17.- | 23.5,8.89 21.59,6.99 SERVO1.2 17.78,5.08 16.51,5.08 15.88,5.71 15.88,42.55 | IC8.3 D3.A | 48.26,22.23 48.41,22.37 IC8.5 | 48.26,22.23 48.26,42.55 | 48.26,42.55 48.26,51.44 | 48.26,42.55 C18.-
  pour Bottom (isolate 0.406, rank 3): 0,100.33 52.07,100.33 52.07,0 0,0
GND2
  Bottom 0.406: IC9.18 67.14,58.59 67.94,57.78 IC9.39 78.11,57.78 78.74,58.42 78.74,59.05 C19.1 78.74,59.27 78.74,84.45 74.93,88.27 74.93,90.17 73.66,91.44 BOOSTER2.4 73.66,97.16 | 66.04,43.81 C22.2 67.31,43.81 | 67.31,43.81 C21.1 | IC9.6 67.94,48.9 71.75,45.09 71.75,43.18 71.12,42.55 69.85,42.55 | 67.31,43.81 67.31,43.18 67.94,42.55 69.85,42.55 | ISP2.4 ISP2.6 ISP2.8 ISP2.10 102.23,51.44 | 92.08,73.03 C25.2 | IC10.9 92.71,66.67 96.52,70.48 96.52,73.66 | 96.52,73.66 95.89,74.3 92.71,74.3 92.08,73.66 92.08,73.03 | 92.08,73.03 C24.2 | 90.17,80.01 IC11.2 | 90.17,80.01 90.81,80.64 95.25,80.64 | 95.25,80.64 96.52,79.38 96.52,73.66 | 90.17,80.01 87.63,82.55 IC11.8 84.45,88.27 84.45,90.17 81.92,92.71 81.92,95.25 80.01,97.16 73.66,97.16 | H11.B3,0 101.6,87 95.25,80.64 | 69.85,82.55 58.42,82.55 57.15,81.28 | 69.85,82.55 70,82.55 Q11.E 70.02,82.72 69.85,82.55 | 81.06,5.29 R29.2 80.64,5.71 | IC12.3 103.5,19.05 104.78,17.78 104.78,7.62 H12.B3,0 93.34,4.45 | IC12.3 102.38,22.08 102.23,22.23 | C20.1 85.09,46.35 90.17,51.44 102.23,51.44 | C23.1 70.06,66.89 69.85,66.67 R24.1 70.48,66.67 70.48,81.92 69.85,82.55 | 73.66,97.16 59.69,97.16 H9.B3,0 57.15,94.61 57.15,81.28 | 57.15,81.28 57.15,5.71 H10.B3,0 60.96,1.91 81.92,1.91 | 93.34,4.45 X3.2 | 81.92,1.91 90.81,1.91 93.34,4.45 | 80.64,5.71 81.92,4.45 81.92,1.91 | 80.64,5.71 77.47,8.89 | 77.47,8.89 C26.- | 77.47,8.89 75.56,6.99 SERVO2.2 71.75,5.08 70.48,5.08 69.85,5.71 69.85,42.55 | IC12.3 D5.A | 102.23,22.23 102.38,22.37 IC12.5 | 102.23,22.23 102.23,42.55 | 102.23,42.55 102.23,51.44 | 102.23,42.55 C27.-
  pour Bottom (isolate 0.406, rank 3): 53.98,100.33 106.05,100.33 106.05,0 53.98,0
MISO
  Bottom 0.406: IC2.2 125.09,52.01 125.09,53.98 125.73,53.98 128.27,51.44 137.79,51.44 140.34,53.98 IC4.15 140.34,60.33 142.24,62.23 149.22,62.23 149.86,61.59 R7.1
MISO1
  Bottom 0.406: IC1.2 17.14,52.01 17.14,53.98 17.78,53.98 20.32,51.44 29.84,51.44 32.38,53.98 IC6.15 32.38,60.33 34.29,62.23 41.27,62.23 41.91,61.59 R17.1
MISO2
  Bottom 0.406: IC9.2 71.12,52.01 71.12,53.98 71.75,53.98 74.3,51.44 83.82,51.44 86.36,53.98 IC10.15 86.36,60.33 88.27,62.23 95.25,62.23 95.89,61.59 R28.1
MOSI
  Bottom 0.406: IC2.1 125.92,51.24 127,50.16 138.43,50.16 141.6,53.34 IC4.14 141.6,59.05 142.88,60.33 148.59,60.33 149.86,59.05 R5.1
MOSI1
  Bottom 0.406: IC1.1 17.97,51.24 19.05,50.16 30.48,50.16 33.66,53.34 IC6.14 33.66,59.05 34.92,60.33 40.64,60.33 41.91,59.05 R15.1
MOSI2
  Bottom 0.406: IC9.1 71.94,51.24 73.03,50.16 84.45,50.16 87.63,53.34 IC10.14 87.63,59.05 88.9,60.33 94.61,60.33 95.89,59.05 R26.1
N$1
  Bottom 0.406: IC2.15 114.61,56.19 113.03,54.61 113.03,11.43 121.28,3.17 ON.A
N$2
  Bottom 0.406: IC2.29 122.72,64.94 126.83,64.94 127,64.77 C10.2
N$3
  Bottom 0.406: R2.2 119.38,66.67 121.12,64.94 IC2.27
N$4
  Bottom 0.406: C9.1 118.75,43.81 118.24,44.32 Q1.1 118.11,45.72 120.32,47.93 IC2.8
N$5
  Bottom 0.406: IC2.7 121.12,47.79 123.19,45.72 | 123.19,45.72 Q1.2 | C8.2 124.04,44.87 123.19,45.72
N$6
  Bottom 0.406: R5.2 150.28,57.57 151.13,58.42 151.13,62.87 151.76,63.5 ISP.1
N$7
  Bottom 0.406: R3.2 121.92,66.67 IC2.28
N$8
  Bottom 0.406: R6.2 150.91,53.12 ISP.7
N$9
  Bottom 0.406: ISP.9 154.31,53.34 154.94,53.98 154.94,56.52 154.31,57.15 153.03,57.15 152.4,57.78 152.4,61.59 153.03,62.23 154.31,62.23 154.94,62.87 154.94,64.14 154.31,64.77 150.91,64.77 R7.2
N$10
  Bottom 0.406: C4.1 10.79,43.81 10.29,44.32 Q5.1 10.16,45.72 12.37,47.93 IC1.8
N$11  (via drill 1.2)
  Top 0.406: v134.62,54.61 134.62,53.34 v144.78,53.34
  Bottom 0.406: IC2.42 128.76,55.38 130.18,53.98 133.99,53.98 v134.62,54.61 | IC4.12 144.15,53.98 v144.78,53.34
N$12
  Bottom 0.406: IC3.1 141.6,76.83 138.43,73.66 138.43,68.58 136.53,66.67 IC4.1
N$13  (via drill 1.2)
  Top 0.406: v127.64,69.85 116.2,69.85 v114.94,68.58
  Bottom 0.406: IC2.16 114.47,56.98 113.03,58.42 113.03,66.67 v114.94,68.58 | v127.64,69.85 R12.1
N$14
  Bottom 0.406: IC2.13 114.91,54.59 114.3,53.98 114.3,12.06 119.38,6.99 SERVO.6
N$15
  Bottom 0.406: IC1.7 13.17,47.79 15.24,45.72 | Q5.2 15.24,45.72 | C3.2 16.09,44.87 15.24,45.72
N$16
  Bottom 0.406: R15.2 42.33,57.57 43.18,58.42 43.18,62.87 43.81,63.5 ISP1.1
N$17
  Bottom 0.406: R16.2 42.97,53.12 ISP1.7
N$18
  Bottom 0.406: ISP1.9 46.35,53.34 46.99,53.98 46.99,56.52 46.35,57.15 45.09,57.15 44.45,57.78 44.45,61.59 45.09,62.23 46.35,62.23 46.99,62.87 46.99,64.14 46.35,64.77 42.97,64.77 R17.2
N$19
  Bottom 0.406: R18.1 28.79,3.6 ON1.K
N$20
  Bottom 0.406: IC1.15 6.66,56.19 5.08,54.61 5.08,11.43 13.34,3.17 ON1.A
N$21
  Bottom 0.406: Q3.C 128.27,79.2 R14.1
N$22
  Bottom 0.406: IC3.4 149.22,78.74 148.59,79.38 146.05,79.38 145.41,78.74 145.41,76.2 144.78,75.56 142.88,75.56 139.7,72.39 139.7,68.58 137.79,66.67 IC4.2
N$23
  Bottom 0.406: R14.2 128.27,82.55 126.22,82.55 Q4.B
N$24
  Bottom 0.406: IC3.6 146.69,88.9 146.37,88.9 | CAN.3 141.12,94.46 140.97,94.61 141.6,95.25 141.6,95.89 142.88,97.16 146.05,97.16 146.37,96.84 146.37,88.9 | 146.37,88.9 R8.1
N$25
  Bottom 0.406: Q3.B 128.44,76.37 128.44,74.47 127.64,73.66 R12.2
N$26
  Bottom 0.406: X1.1 142.24,4.45 137.79,8.89 D1.A
N$27
  Bottom 0.406: IC1.29 14.77,64.94 18.89,64.94 19.05,64.77 C7.2
N$28
  Bottom 0.406: R11.2 11.43,66.67 13.17,64.94 IC1.27
N$29
  Bottom 0.406: R10.2 13.97,66.67 IC1.28
N$30
  Bottom 0.406: 152.4,17.3 152.4,17.14 | 152.4,17.3 IC5.2 | 140.97,19.05 D2.C 140.34,19.05 | 152.4,17.3 150.01,17.3 148.59,15.88 141.6,15.88 140.34,17.14 140.34,19.05 | L1.2 141.6,22.86 140.34,21.59 140.34,19.05
  pour Bottom (isolate 1.016, no thermals): 137.16,28.57 146.05,28.57 146.05,24.13 137.16,24.13
N$31
  Bottom 0.406: R4.1 136.74,3.6 ON.K
N$32
  Bottom 0.406: Q6.B 20.49,76.37 20.49,74.47 19.68,73.66 R19.2
N$33
  Bottom 0.406: Q6.C 20.32,79.2 R20.1
N$34
  Bottom 0.406: R20.2 20.32,82.55 18.27,82.55 Q7.B
N$35  (via drill 1.2)
  Top 0.406: v19.68,69.85 8.26,69.85 v6.99,68.58
  Bottom 0.406: IC1.16 6.51,56.98 5.08,58.42 5.08,66.67 v6.99,68.58 | v19.68,69.85 R19.1
N$36
  Bottom 0.406: IC1.13 6.96,54.59 6.35,53.98 6.35,12.06 11.43,6.99 SERVO1.6
N$37
  Bottom 0.406: IC7.1 33.66,76.83 30.48,73.66 30.48,68.58 28.57,66.67 IC6.1
N$38
  Bottom 0.406: IC6.7 36.2,69.85 35.56,70.48 Q8.1 35.56,70.61 35.56,73.03 C11.1
N$39
  Bottom 0.406: IC6.8 37.47,67.31 40.64,70.48 Q8.2 41.27,71.25 41.27,73.03 C16.1
N$40
  Bottom 0.406: IC7.6 38.73,88.9 38.42,88.9 | CAN1.3 33.17,94.46 33.02,94.61 33.66,95.25 33.66,95.89 34.92,97.16 38.1,97.16 38.42,96.84 38.42,88.9 | 38.42,88.9 R22.1
N$41
  Bottom 0.406: IC7.7 36.2,88.9 | 36.2,88.9 R22.2 | 36.67,94.46 36.83,94.61 | 36.67,94.46 CAN1.2 | 36.2,88.9 36.2,93.98 36.67,94.46
N$42
  Bottom 0.406: IC7.4 41.27,78.74 40.64,79.38 38.1,79.38 37.47,78.74 37.47,76.2 36.83,75.56 34.92,75.56 31.75,72.39 31.75,68.58 29.84,66.67 IC6.2
N$43  (via drill 1.2)
  Top 0.406: v26.67,54.61 26.67,53.34 v36.83,53.34
  Bottom 0.406: IC1.42 20.82,55.38 22.23,53.98 26.04,53.98 v26.67,54.61 | IC6.12 36.2,53.98 v36.83,53.34
N$44
  Bottom 0.406: X2.1 34.29,4.45 29.84,8.89 D4.A
N$45
  Bottom 0.406: 44.45,17.3 44.45,17.14 | 44.45,17.3 IC8.2 | 33.02,19.05 D3.C 32.38,19.05 | 44.45,17.3 42.06,17.3 40.64,15.88 33.66,15.88 32.38,17.14 32.38,19.05 | L2.2 33.66,22.86 32.38,21.59 32.38,19.05
  pour Bottom (isolate 1.016, no thermals): 29.21,28.57 38.1,28.57 38.1,24.13 29.21,24.13
N$46
  Bottom 0.406: C22.1 64.77,43.81 64.26,44.32 Q9.1 64.14,45.72 66.34,47.93 IC9.8
N$47
  Bottom 0.406: IC9.7 67.14,47.79 69.22,45.72 | 69.22,45.72 Q9.2 | C21.2 70.06,44.87 69.22,45.72
N$48
  Bottom 0.406: R26.2 96.31,57.57 97.16,58.42 97.16,62.87 97.79,63.5 ISP2.1
N$49
  Bottom 0.406: R27.2 96.94,53.12 ISP2.7
N$50
  Bottom 0.406: ISP2.9 100.33,53.34 100.97,53.98 100.97,56.52 100.33,57.15 99.06,57.15 98.42,57.78 98.42,61.59 99.06,62.23 100.33,62.23 100.97,62.87 100.97,64.14 100.33,64.77 96.94,64.77 R28.2
N$51
  Bottom 0.406: R29.1 82.77,3.6 ON2.K
N$52
  Bottom 0.406: IC9.15 60.63,56.19 59.05,54.61 59.05,11.43 67.31,3.17 ON2.A
N$53
  Bottom 0.406: IC4.7 144.15,69.85 143.51,70.48 Q2.1 143.51,70.61 143.51,73.03 C13.1
N$54
  Bottom 0.406: IC4.8 145.41,67.31 148.59,70.48 Q2.2 149.22,71.25 149.22,73.03 C12.1
N$55
  Bottom 0.406: IC9.29 68.75,64.94 72.86,64.94 73.03,64.77 C23.2
N$56
  Bottom 0.406: R25.2 65.41,66.67 67.14,64.94 IC9.27
N$57
  Bottom 0.406: R24.2 67.94,66.67 IC9.28
N$58
  Bottom 0.406: Q10.B 74.47,76.37 74.47,74.47 73.66,73.66 R30.2
N$59
  Bottom 0.406: IC3.7 144.15,88.9 | 144.15,88.9 R8.2 | 144.62,94.46 144.78,94.61 | 144.62,94.46 CAN.2 | 144.15,88.9 144.15,93.98 144.62,94.46
N$60
  Bottom 0.406: Q10.C 74.3,79.2 R31.1
N$61
  Bottom 0.406: R31.2 74.3,82.55 72.24,82.55 Q11.B
N$62  (via drill 1.2)
  Top 0.406: v73.66,69.85 62.23,69.85 v60.96,68.58
  Bottom 0.406: IC9.16 60.49,56.98 59.05,58.42 59.05,66.67 v60.96,68.58 | v73.66,69.85 R30.1
N$63
  Bottom 0.406: IC9.13 60.94,54.59 60.33,53.98 60.33,12.06 65.41,6.99 SERVO2.6
N$64
  Bottom 0.406: IC11.1 87.63,76.83 84.45,73.66 84.45,68.58 82.55,66.67 IC10.1
N$65
  Bottom 0.406: IC10.7 90.17,69.85 89.53,70.48 Q12.1 89.53,70.61 89.53,73.03 C24.1
N$66
  Bottom 0.406: IC10.8 91.44,67.31 94.61,70.48 Q12.2 95.25,71.25 95.25,73.03 C25.1
N$67
  Bottom 0.406: IC11.6 92.71,88.9 92.39,88.9 | CAN2.3 87.15,94.46 87,94.61 87.63,95.25 87.63,95.89 88.9,97.16 92.08,97.16 92.39,96.84 92.39,88.9 | 92.39,88.9 R33.1
N$68
  Bottom 0.406: IC11.7 90.17,88.9 | 90.17,88.9 R33.2 | 90.65,94.46 90.81,94.61 | 90.65,94.46 CAN2.2 | 90.17,88.9 90.17,93.98 90.65,94.46
N$69
  Bottom 0.406: IC11.4 95.25,78.74 94.61,79.38 92.08,79.38 91.44,78.74 91.44,76.2 90.81,75.56 88.9,75.56 85.72,72.39 85.72,68.58 83.82,66.67 IC10.2
N$70  (via drill 1.2)
  Top 0.406: v80.64,54.61 80.64,53.34 v90.81,53.34
  Bottom 0.406: IC9.42 74.79,55.38 76.2,53.98 80.01,53.98 v80.64,54.61 | IC10.12 90.17,53.98 v90.81,53.34
N$71
  Bottom 0.406: X3.1 88.27,4.45 83.82,8.89 D6.A
N$72
  Bottom 0.406: 98.42,17.3 98.42,17.14 | 98.42,17.3 IC12.2 | 87,19.05 D5.C 86.36,19.05 | 98.42,17.3 96.03,17.3 94.61,15.88 87.63,15.88 86.36,17.14 86.36,19.05 | L3.2 87.63,22.86 86.36,21.59 86.36,19.05
  pour Bottom (isolate 1.016, no thermals): 83.19,28.57 92.08,28.57 92.08,24.13 83.19,24.13
PWM_LOAD
  Bottom 0.406: BOOSTER.3 127.64,90.17 126.36,91.44 126.36,93.34 125.73,93.98 123.83,93.98 121.28,91.44 121.28,85.94 R13.1 121.92,85.72 122.72,84.92 Q4.C
PWM_LOAD1
  Bottom 0.406: BOOSTER1.3 19.68,90.17 18.41,91.44 18.41,93.34 17.78,93.98 15.88,93.98 13.34,91.44 13.34,85.94 R21.1 13.97,85.72 14.78,84.92 Q7.C
PWM_LOAD2
  Bottom 0.406: BOOSTER2.3 73.66,90.17 72.39,91.44 72.39,93.34 71.75,93.98 69.85,93.98 67.31,91.44 67.31,85.94 R32.1 67.94,85.72 68.75,84.92 Q11.C
RELEASE
  Bottom 0.406: IC2.41 129.24,56.19 130.18,55.24 132.72,55.24 135.25,57.78 135.25,89.53 130.81,93.98 129.54,93.98 128.91,93.34 128.91,91.44 130.18,90.17 BOOSTER.5
RELEASE1
  Bottom 0.406: IC1.41 21.29,56.19 22.23,55.24 24.77,55.24 27.3,57.78 27.3,89.53 22.86,93.98 21.59,93.98 20.95,93.34 20.95,91.44 22.23,90.17 BOOSTER1.5
RELEASE2
  Bottom 0.406: IC9.41 75.26,56.19 76.2,55.24 78.74,55.24 81.28,57.78 81.28,89.53 76.83,93.98 75.56,93.98 74.93,93.34 74.93,91.44 76.2,90.17 BOOSTER2.5
RST  (via drill 1.2)
  Top 0.406: v135.89,44.45 139.7,44.45 ISP.5
  Bottom 0.406: IC2.4 123.52,49.84 125.73,47.62 129.54,47.62 130.18,46.99 130.18,46.35 | 130.18,46.35 R1.1 | 137.79,55.88 IC4.17 137.79,60.96 140.34,63.5 147.32,63.5 147.96,64.14 147.96,65.41 149.22,66.67 156.21,66.67 157.48,65.41 157.48,62.87 156.84,62.23 155.57,62.23 154.94,61.59 154.94,59.69 ISP.5 | 130.18,46.35 C6.2 131.87,45.3 132.72,44.45 v135.89,44.45
RST1  (via drill 1.2)
  Top 0.406: v27.94,44.45 31.75,44.45 ISP1.5
  Bottom 0.406: IC1.4 15.57,49.84 17.78,47.62 21.59,47.62 22.23,46.99 22.23,46.35 | 22.23,46.35 R9.1 | 29.84,55.88 IC6.17 29.84,60.96 32.38,63.5 39.37,63.5 40.01,64.14 40.01,65.41 41.27,66.67 48.26,66.67 49.53,65.41 49.53,62.87 48.9,62.23 47.62,62.23 46.99,61.59 46.99,59.69 ISP1.5 | 22.23,46.35 C2.2 23.91,45.3 24.77,44.45 v27.94,44.45
RST2  (via drill 1.2)
  Top 0.406: v81.92,44.45 85.72,44.45 ISP2.5
  Bottom 0.406: IC9.4 69.55,49.84 71.75,47.62 75.56,47.62 76.2,46.99 76.2,46.35 | 76.2,46.35 R23.1 | 83.82,55.88 IC10.17 83.82,60.96 86.36,63.5 93.34,63.5 93.98,64.14 93.98,65.41 95.25,66.67 102.23,66.67 103.5,65.41 103.5,62.87 102.87,62.23 101.6,62.23 100.97,61.59 100.97,59.69 ISP2.5 | 76.2,46.35 C20.2 77.89,45.3 78.74,44.45 v81.92,44.45
S$1
  Top 2: 20,-1 -1,-1 -1,20
S$2
  Top 2: 140,-1 161,-1 161,20
S$3
  Top 2: 20,101 -1,101 -1,80
S$4
  Top 2: 161,80 161,101 140,101
S$5
  Bottom 2: 20,-1 -1,-1 -1,20
S$6
  Bottom 2: 140,-1 161,-1 161,20
S$7
  Bottom 2: 20,101 -1,101 -1,80
S$8
  Bottom 2: 161,80 161,101 140,101
SCK
  Bottom 0.406: IC2.3 124.32,50.94 126.36,48.9 139.06,48.9 142.88,52.7 IC4.13 142.88,57.15 143.51,57.78 147.32,57.78 147.96,57.15 147.96,56.52 149.22,55.24 149.86,55.24 R6.1
SCK1
  Bottom 0.406: IC1.3 16.37,50.94 18.41,48.9 31.11,48.9 34.92,52.7 IC6.13 34.92,57.15 35.56,57.78 39.37,57.78 40.01,57.15 40.01,56.52 41.27,55.24 41.91,55.24 R16.1
SCK2
  Bottom 0.406: IC9.3 70.34,50.94 72.39,48.9 85.09,48.9 88.9,52.7 IC10.13 88.9,57.15 89.53,57.78 93.34,57.78 93.98,57.15 93.98,56.52 95.25,55.24 95.89,55.24 R27.1

## Text on the board
Drill_legend: Bohrlegende | Datum: 22.01.2008 14:55:13 | 7 unterschiedliche Durchmesser | mit Standardsymbol! (156 Bohrungen) | 3.0000 mm / 118.110 mil | 1.4224 mm / 56.000 mil | 1.3208 mm / 52.000 mil | 1.1176 mm / 44.000 mil | 1.0160 mm / 40.000 mil | 0.9144 mm / 36.000 mil | 0.8128 mm / 32.000 mil | 1.2000 mm / 47.244 mil | 0.9000 mm / 35.433 mil